# EAGLE board hacksaw_main_r0 (EAGLE 7.3.0)
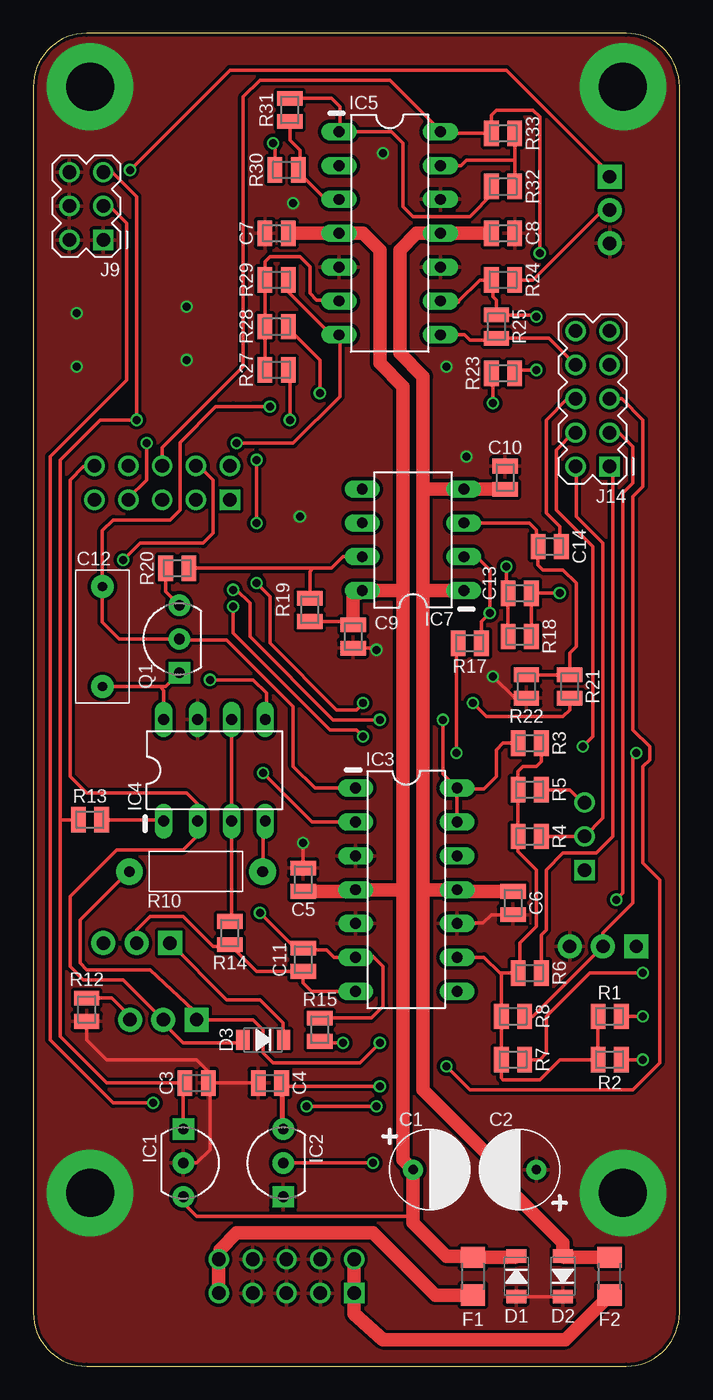
[diagram p0: board, top side]
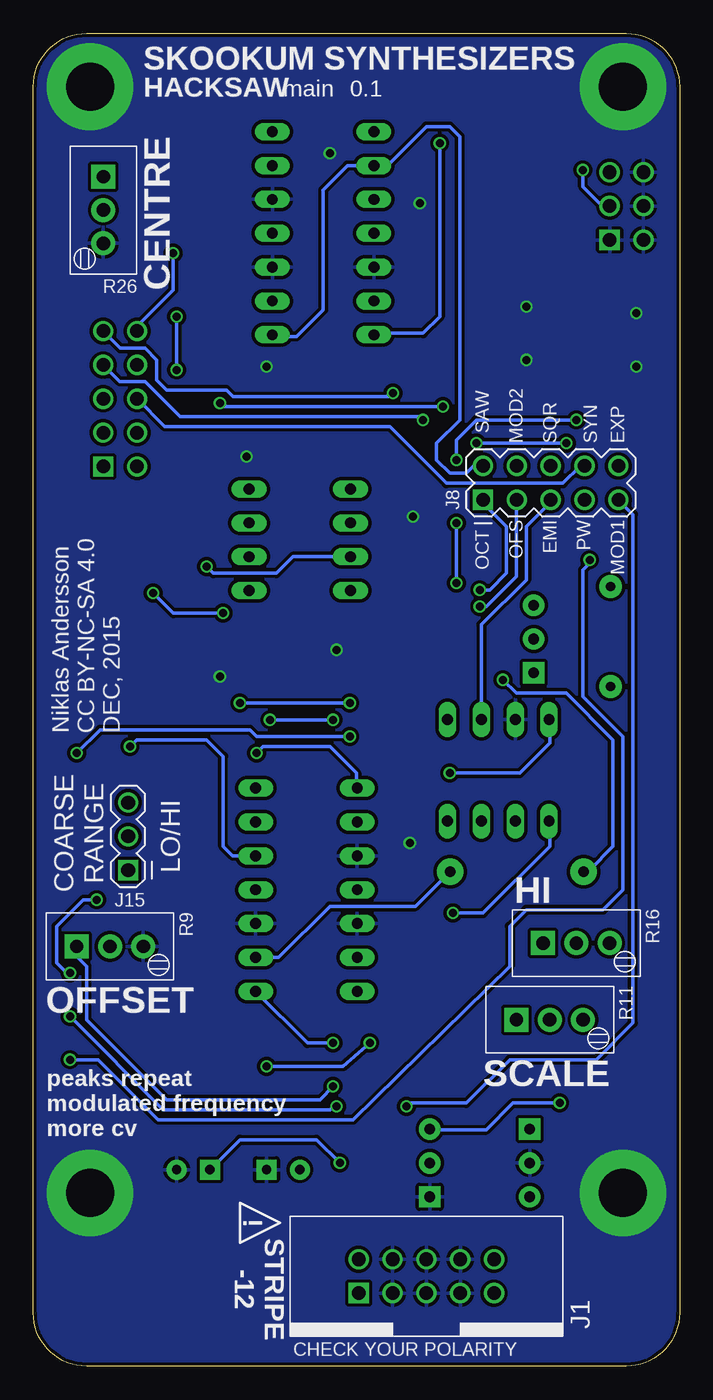
[diagram p1: board, bottom side, seen from below]

Size 48.5 x 100 mm. Coordinates in mm from the lower left corner, seen from the top.
Outline: 4,0 44.5,0 arc90 48.5,4 48.5,96 arc90 44.5,100 4,100 arc90 0,96 0,4 arc90 4,0
Copper layers (1*16): Top 0.035mm / dielectric 1.5mm / Bottom 0.035mm
Design rules "dirt_cheap_dirty_boards.v1 *": minimum track width 5mil, minimum drill 12mil, track to track 6mil, track to pad 6mil, pad to pad 6mil, via to via 6mil, smd to smd 0mil, copper to edge 10mil, drill to drill 10mil, minimum pad ring 10mil, minimum via ring 6mil, stop-mask expansion 2mil, vias tented up to drill 25mil, thermal gap 10mil

## Footprints (pad centres in the part's own frame; a part is rotated, then mirrored left to right if it is on the bottom)
CAP_POL_2.5-6 = drill 0.7 pad 1.5: + -1.25,0 | drill 0.7 pad 1.5 square: - 1.25,0
0805 = smd 1.1 x 1.9: 1 -0.875,0; 2 0.875,0
PHE450 = drill 0.7 pad 1.7: 1 -3.75,0; 2 3.75,0
SOD123 = smd 1 x 1.5: A 1.525,0; K -1.525,0
1206 = smd 1.6 x 1.803: 1 -1.422,0; 2 1.422,0
TO-92_2 = drill 0.8 pad 1.6 square: 1 -2.54,0 | drill 0.8 pad 1.6: 2 0,0; 3 2.54,0
DIL14 = drill 0.813 long: 1 -7.62,-3.81; 2 -5.08,-3.81; 3 -2.54,-3.81; 4 0,-3.81; 5 2.54,-3.81; 6 5.08,-3.81; 7 7.62,-3.81; 8 7.62,3.81; 9 5.08,3.81; 10 2.54,3.81; 11 0,3.81; 12 -2.54,3.81; 13 -5.08,3.81; 14 -7.62,3.81
DIL8 = drill 0.813 long: 1 -3.81,-3.81; 2 -1.27,-3.81; 3 1.27,-3.81; 4 3.81,-3.81; 5 3.81,3.81; 6 1.27,3.81; 7 -1.27,3.81; 8 -3.81,3.81
HDR_POWER_10 = drill 1.016: +12V1 5.08,1.27; +12V2 5.08,-1.27; -12V1 -5.08,1.27; GND1 2.54,1.27; GND2 2.54,-1.27; GND3 0,1.27; GND4 0,-1.27; GND5 -2.54,1.27; GND6 -2.54,-1.27 | drill 1.016 square: -12V2 -5.08,-1.27
HDR_M_5X2 = drill 1.016 square: 1 0,0 | drill 1.016: 2 0,2.54; 3 2.54,0; 4 2.54,2.54; 5 5.08,0; 6 5.08,2.54; 7 7.62,0; 8 7.62,2.54; 9 10.16,0; 10 10.16,2.54
HDR_M_3X2 = drill 1.016 square: 1 0,0 | drill 1.016: 2 0,2.54; 3 2.54,0; 4 2.54,2.54; 5 5.08,0; 6 5.08,2.54
HDR_M_3 = drill 1.016 square: 1 -2.54,0 | drill 1.016: 2 0,0; 3 2.54,0
M3 = drill 3.6 pad 6.5: M3 0,0
PV36W = drill 1 pad 1.8 square: 1 -2.5,0 | drill 1 pad 1.8: 2 0,0; 3 2.5,0
RESISTOR_TH_1/4W = drill 0.8 pad 2: 1 -5,0; 2 5,0

## Placement (x,y rotation side)
C1  33u  [CAP_POL_2.5-6]  29.75,14.75 0 top
C2  33u  [CAP_POL_2.5-6]  36.5,14.75 180 top
C3  104  [0805]  12.25,21.25 0 top
C4  104  [0805]  17.75,21.25 0 top
C5  104  [0805]  20.25,36.5 90 top
C6  104  [0805]  36,34.75 90 top
C7  104  [0805]  18.25,85 180 top
C8  104  [0805]  35.25,85 180 top
C9  104  [0805]  24,54.75 270 top
C10  104  [0805]  35.41,66.66 270 top
C11  101  [0805]  20.25,30.5 270 top
C12  222  [PHE450]  5.18,54.74 90 top
C13  15  [0805]  36.5,58 180 top
C14  471  [0805]  38.75,61.5 180 top
D1  5819  [SOD123]  36.25,6.75 270 top
D2  5819  [SOD123]  39.75,6.75 90 top
D3  4148  [SOD123]  17.25,24.5 180 top
F1  0ZCJ  [1206]  33,6.75 90 top
F2  0ZCJ  [1206]  43.25,6.75 270 top
IC1  78L05  [TO-92_2]  11.25,15.25 270 top
IC2  79L05  [TO-92_2]  18.75,15.25 90 top
IC3  TL074CN  [DIL14]  28,35.75 270 top
IC4  SSM2212  [DIL8]  13.6,44.71 0 top
IC5  TL074CN  [DIL14]  26.75,85 270 top
IC7  LM311P  [DIL8]  28.5,62 90 top
J1  [HDR_POWER_10]  19,6.75 0 bottom
J8  CONN_HDR_5X21  [HDR_M_5X2]  14.75,65 0 bottom
J9  CONN_HDR_3X21  [HDR_M_3X2]  5.25,84.5 90 top
J14  CONN_HDR_5X21  [HDR_M_5X2]  43.25,67.5 90 top
J15  TERMINAL_3_MHDR  [HDR_M_3]  41.38,39.75 90 bottom
M2  MOUNTING_HOLEM3  [M3]  4.25,13 0 top
M3  MOUNTING_HOLEM3  [M3]  44.25,13 0 top
M4  MOUNTING_HOLEM3  [M3]  4.25,96 0 top
M5  MOUNTING_HOLEM3  [M3]  44.25,96 0 top
Q1  2N5485  [TO-92_2]  10.95,54.56 90 top
R1  100K  [0805]  43.25,26.25 180 top
R2  100K  [0805]  43.25,23 180 top
R3  100K  [0805]  37.25,46.75 180 top
R4  100K  [0805]  37.25,39.75 180 top
R5  100K  [0805]  37.25,43.25 180 top
R6  1M2  [0805]  37.25,29.5 180 top
R7  100K  [0805]  36,23 180 top
R8  47K  [0805]  36,26.25 180 top
R9  10K  [PV36W]  42.75,31.5 0 bottom
R10  2K  [RESISTOR_TH_1/4W]  12.21,37.11 180 top
R11  100R  [PV36W]  9.75,26 0 bottom
R12  390R  [0805]  4,26.75 270 top
R13  1M  [0805]  4.25,41 180 top
R14  2K  [0805]  14.75,32.5 90 top
R15  100K  [0805]  21.5,25.25 270 top
R16  1MEG  [PV36W]  7.75,31.75 0 bottom
R17  10K  [0805]  32.75,54.25 0 top
R18  100K  [0805]  36.5,54.75 180 top
R19  10K  [0805]  20.75,56.75 270 top
R20  1K  [0805]  10.8,59.87 0 top
R21  47K  [0805]  40.25,51 270 top
R22  91K  [0805]  37,51 90 top
R23  120K  [0805]  35.25,74.5 0 top
R24  120K  [0805]  35.25,81.5 180 top
R25  300K  [0805]  34.75,78 270 top
R26  10K  [PV36W]  43.25,86.75 270 bottom
R27  110K  [0805]  18.25,74.75 180 top
R28  110K  [0805]  18.25,78 180 top
R29  100K  [0805]  18.25,81.5 0 top
R30  10K  [0805]  19,89.75 0 top
R31  1M  [0805]  19.25,94.25 90 top
R32  100K  [0805]  35.25,88.5 0 top
R33  47K  [0805]  35.25,92.5 180 top

## Library data of the parts
C1-C14 D1-D3 F1 F2 IC1-IC5 IC7 J1 J8 J9 J14 J15 M2-M5 Q1 R1-R33 = 000

## Nets
2_COARSE: J14.2 J15.2 R4.1
2_EXP: J14.3 R7.1
2_FINE: J14.1 R6.1
2_LIN: J14.5 R15.2
2_PULSE_OUT: IC5.14 J8.6 J14.10 R33.2
2_PWM: J14.7 R27.1
2_PWM_INIT: J14.9 R28.1
2_SAW_OUT: IC5.2 IC5.8 J8.2 J14.8 R25.2
2_SYNC_IN: C14.1 J8.8 J14.6
2_SYNC_PULSE: C13.2 IC7.7 R18.2 R19.1 R20.2
2_V/OCT: IC3.12 J14.4
+5V: C3.1 IC1.1 J9.5 R13.2 R21.2
+12V: C1.+ C5.1 C7.1 C9.1 D1.K F1.2 IC1.3 IC3.4 IC5.4 IC7.8 R19.2
-5V: C4.2 IC2.3 J9.3 R9.1 R26.1
-12V: C2.- C6.2 C8.2 C10.2 D2.A F2.1 IC2.2 IC3.11 IC5.11 IC7.1 IC7.4
C1: C11.1 IC3.6 IC4.1 R13.1 R15.1
C2: C12.1 IC3.2 IC4.8 Q1.1
CV: IC3.8 R10.2 R11.1
EMIT: IC4.3 IC4.6 J8.5 R14.2
EXPO: D3.A IC4.2 J8.10 R11.2
GND: C1.- C2.+ C3.2 C4.1 C5.2 C6.1 C7.2 C8.1 C9.2 C10.1 D1.A D2.K IC1.2 IC2.1 IC3.3 IC3.5 IC3.10 IC4.7 IC5.5 IC5.10 IC5.12 J1.GND1 J1.GND2 J1.GND3 J1.GND4 J1.GND5 J1.GND6 J9.1 J9.2 J9.4 J9.6 M2.M3 M3.M3 M4.M3 M5.M3 R9.3 R12.2 R22.1 R26.3
MOD1: J8.9 R1.1
MOD2: J8.4 R2.1
N$3: C13.1 IC7.2 R17.2 R18.1
N$4: F1.1 J1.+12V1 J1.+12V2
N$5: R11.3 R12.1
N$6: IC5.1 R31.2 R32.1
N$8: D3.K R16.1
N$9: IC5.6 R27.2 R28.2 R29.1
N$10: Q1.3 R20.1
N$11: IC5.3 R30.2 R31.1
N$16: J15.3 R5.1
N$17: IC5.13 R32.2 R33.1
N$19: IC3.9 R1.2 R2.2 R3.1 R4.2 R5.2 R6.2 R7.2 R8.2 R10.1
N$30: IC5.9 R23.2 R24.2 R25.1
N$33: R24.1 R26.2
N$41: F2.2 J1.-12V1 J1.-12V2
N$54: C11.2 IC3.7 R14.1 R16.2
OFFSET: J8.3 R8.1 R9.2
PW: IC5.7 J8.7 R29.2 R30.1
RAW: C12.2 IC3.1 Q1.2 R17.1 R23.1
RESET: C14.2 IC7.3 R21.1 R22.2
V/OCT: IC3.13 IC3.14 J8.1 R3.2

## Tracks (layer width: path | path; a pad name or v marks a point on that pad's centre or on a via)
2_COARSE
  Top 0.25: R4.1 J15.2 42.75,41.12 42.75,61.75 40.75,63.75 40.75,67.46 J14.2
2_EXP  (via drill 0.6)
  Top 0.25: J14.3 43.96,70.04 45,69 45,66.25 44.25,65.5 44.25,35.5 v43.75,35 | R7.1 38,23 38.5,23.5 38.5,26.25 41.75,29.5 v45.75,29.5
  Bottom 0.25: v45.75,29.5 46,29.5 46.75,30.25 46.75,33 44.75,35 v43.75,35
2_FINE
  Top 0.25: R6.1 38.12,32.38 38.5,32.75 38.5,37.25 39.75,38.5 42.25,38.5 43.5,39.75 43.5,67.25 J14.1
2_LIN  (via drill 0.6)
  Top 0.25: v23.25,24.25 21.62,24.25 R15.2 | J14.5 44.17,72.58 45.75,71 45.75,66 45,65.25 45,47.75 46.25,46.5 46.25,45.5 45.75,45 45.75,37.75 47,36.5 47,22.75 45,20.75 32.75,20.75 v31,22.5
  Bottom 0.25: v31,22.5 25.25,22.5 v23.25,24.25
2_PULSE_OUT  (via drill 0.6)
  Top 0.25: J8.6 9.67,68.92 15.75,75 15.75,95.25 17,96.5 26.75,96.5 30.56,92.69 IC5.14 30.68,92.5 R33.2 34.38,93.88 34.75,94.25 37.5,94.25 38,93.75 v38,83.5
  Bottom 0.25: 30.44,92.5 IC5.14 | v38,83.5 38,80.75 40.75,78 40.75,77.7 J14.10
2_PWM  (via drill 0.6)
  Top 0.25: R27.1 19.25,74.75 v19.25,71
  Bottom 0.25: v19.25,71 19.5,71.25 37.5,71.25 40.12,73.88 42.01,73.88 J14.7
2_PWM_INIT  (via drill 0.6)
  Top 0.25: R28.1 19.12,77.88 21.5,75.5 v21.5,73
  Bottom 0.25: J14.9 41.97,76.38 40.12,76.38 39.25,75.5 39.25,74 38.5,73.25 34,73.25 33.5,72.75 21.75,72.75 v21.5,73
2_SAW_OUT
  Top 0.25: IC5.8 32.37,77.38 32.75,77 34.62,77 R25.2 38.7,77.12 J14.8
  Bottom 0.25: 14.71,67.54 J8.2 15.46,67.54 16,67 17.25,67 18.25,68 18.25,69.25 16.5,71 16.5,92.25 17.25,93 19,93 22,90 22.86,90 IC5.2 24.92,90.08 26.75,88.25 26.75,79.25 28.75,77.25 30.43,77.25 IC5.8
2_SYNC_IN
  Top 0.25: J14.6 40.08,72.58 38.5,71 38.5,64 39.5,63 39.5,61.62 C14.1
  Bottom 0.25: J8.8 7.46,67.54 8.75,66.25 17.5,66.25 21.75,70.5 38.63,70.5 J14.6
2_SYNC_PULSE  (via drill 0.6)
  Top 0.25: R20.2 21,59.87 | 21,59.87 22.37,59.87 23.25,60.75 24.67,60.75 IC7.7 | R18.2 C13.2 35.5,58.12 v35.5,60 | R19.1 20.75,59.62 21,59.87
  Bottom 0.25: IC7.7 29.02,60.73 30.25,59.5 35,59.5 v35.5,60
2_V/OCT  (via drill 0.6)
  Top 0.25: v41.25,46.5 42,47.25 42,61.5 39.25,64.25 39.25,68.75 40.54,70.04 J14.4
  Bottom 0.25: IC3.12 33.54,38.29 34.25,39 34.25,45.75 35.5,47 40.75,47 v41.25,46.5
+5V  (via drill 0.6)
  Top 0.25: IC1.1 11.25,21.12 C3.1 5.5,21.25 2,24.75 2,41 | R13.2 2,41 | 2,41 2,68 5,71 v7.75,71 7.75,87.75 6,89.5 5.33,89.5 J9.5 | R21.2 40.25,49.25 39.75,48.75 34,48.75 v33,49.75 | v16.75,58.75 17.75,57.75 17.75,54.25 22.75,49.25 24.25,49.25 v24.75,49.75 | v16.75,63.25 v16.75,68
  Bottom 0.25: v33,49.75 v24.75,49.75 | v7.75,71 15.25,71 16.75,69.5 v16.75,68 | v16.75,58.75 v16.75,63.25
+12V
  Top 0.25: IC1.3 11.25,12.25 12.25,11.25 28,11.25 28.5,10.75 | 24.19,35.62 IC3.4 | 27.31,58.19 27.75,58.25 | 23.93,55.7 C9.1 23.75,55.88 R19.2 | 27.5,65.81 27.75,65.5 | 24.5,58 IC7.8 | 32.92,8.25 F1.2 | 36.15,8.17 D1.K
  Top 1: 27.75,35.75 27.75,15.5 C1.+ 28.5,10.75 31,8.25 32.92,8.25 | C5.1 24.19,35.62 | IC3.4 27.75,35.75 | 27.75,35.75 27.75,58.25 27.75,65.5 27.75,73.5 26,75.25 26,83.75 24.75,85 IC5.4 C7.1 | C9.1 24,58 24.5,58 | IC7.8 27.31,58.19 | F1.2 36.15,8.17
-5V  (via drill 0.6)
  Top 0.25: IC2.3 18.75,21.12 C4.2 | v26,21 18.88,21 C4.2 | C4.2 18.62,17.88 v18.75,17.75 | R26.1 43,89.5 43,89.75 35.5,97.25 14.75,97.25 v7.25,89.75 | v9,19.75 6,19.75 1.25,24.5 1.25,68.25 7,74 7,85.75 5.75,87 5.29,87 J9.3
  Bottom 0.25: v26,21 27,20 38.5,20 44.5,26 44.5,30 45.25,30.75 R9.1 | v18.75,17.75 14.5,17.75 12.5,19.75 v9,19.75 | v7.25,89.75 7.25,88.5 5.75,87 5.29,87 J9.3
-12V  (via drill 0.6)
  Top 0.25: IC2.2 v25.5,15.25 | 31.81,35.62 IC3.11 | 35.38,65.81 C10.2 35.41,65.81 | 29.56,65.81 29.25,65.75 | 29.69,58.19 29.25,58 | 39.85,8.17 D2.A
  Top 1: IC3.11 29.25,35.75 | 29.25,35.75 29.25,20.75 C2.- 35.25,13.75 39.75,9.25 D2.A | C6.2 31.81,35.62 | 29.25,35.75 29.25,58 29.25,65.75 29.25,74.25 27.5,76 27.5,83.75 28.75,85 IC5.11 C8.2 | 29.56,65.81 IC7.4 35.41,65.81 | IC7.1 29.69,58.19 | F2.1 39.85,8.17
  Bottom 0.25: C2.- 33,17 27.25,17 v25.5,15.25
C1  (via drill 0.6)
  Top 0.25: 9.75,40.94 IC4.1 | 9.75,40.86 IC4.1 | R15.1 25.38,26.12 26.25,27 26.25,30 25.5,30.75 24.27,30.75 IC3.6 22.58,30.67 22,31.25 20.38,31.25 C11.1 19.62,31.38 v17,34 | R13.1 9.69,41 IC4.1
  Bottom 0.25: v17,34 14.75,34 9.75,39 9.75,40.86 IC4.1
C2  (via drill 0.6)
  Top 0.25: C12.1 9.5,50.99 | 9.5,50.99 9.92,50.99 Q1.1 | IC4.8 9.79,50.7 9.5,50.99 | IC3.2 20.92,40.83 v17.25,44.5
  Bottom 0.25: v17.25,44.5 12,44.5 9.75,46.75 9.75,48.48 IC4.8
CV  (via drill 0.6)
  Top 0.25: R10.2 7.25,37.07 7.25,37.25 3.5,33.5 3.5,30.25 4,29.75 8.75,29.75 12.5,26.25 R11.1 16.5,26 17.25,25.25 17.25,23.5 18,22.75 24.5,22.75 v26,24.25
  Bottom 0.25: v26,24.25 27.93,24.25 IC3.8
EMIT
  Top 0.25: R14.2 14.87,33.38 IC4.3 IC4.6
  Bottom 0.25: J8.5 9.75,64.92 9.75,64.75 11.5,63 11.5,59 14.87,55.63 IC4.6
EXPO
  Top 0.25: D3.A 15.22,24.25 11.25,24.25 9.75,25.75 R11.2 6.75,29 3.75,29 2.75,30 2.75,35.25 6.25,38.75 11.25,38.75 12.25,39.75 12.25,40.82 IC4.2 12.33,42.17 11.5,43 4,43 2.75,44.25 2.75,66.5 3.75,67.5 4.55,67.5 J8.10
GND  (via drill 0.6)
  Top 0.25: C3.2 C4.1 | IC1.2 12.25,15.25 13.25,16.25 13.25,21.12 C3.2 | D2.K D1.A | C5.2 v20.25,39.25 | C6.1 34.38,33.88 33.75,33.25 31.85,33.25 IC3.10 | R12.2 4,24.5 5.5,23 12.25,23 13,22.25 13,21.38 C3.2 | C9.2 25.62,53.88 v25.75,53.75 | R22.1 36.12,50.12 v34.5,51.75
  other vias: 20,63.75 32.5,68.25 31,75 26.25,91 19.5,87.25 11.5,79.5 11.5,75.5 3.25,75 3.25,79
  pour Bottom (isolate 0.25): 0,100 48.5,100 48.5,0 0,0
  pour Top (isolate 0.25): 0,100 48.5,100 48.5,0 0,0
MOD1  (via drill 0.6)
  Top 0.25: R1.1 v45.75,26.25 | v20.5,19.5 v25.75,19.5
  Bottom 0.25: v20.5,19.5 20.25,19.75 16,19.75 12.75,23 6.25,23 3.5,25.75 3.5,63.91 J8.9 | v45.75,26.25 38.75,19.25 26.25,19.25 26,19.5 v25.75,19.5
MOD2  (via drill 0.6)
  Top 0.25: R2.1 v45.75,23 | J8.4 12.46,67.54 13.5,66.5 13.5,62.5 12.75,61.75 8,61.75 v6.75,60.5
  Bottom 0.25: v6.75,60.5 6.75,60.25 7.25,59.75 7.25,50.25 4.25,47.25 4.25,35.75 5.75,34.25 11.5,34.25 12.75,33 12.75,30 24.5,18.5 39.12,18.5 43.62,23 v45.75,23
N$2
  Top 0.25: 17.25,36.75 17.25,40.25 17.5,40.75
N$3  (via drill 0.6)
  Top 0.25: R17.2 33.62,55.88 v34.25,56.5 34.25,59.75 33.25,60.75 32.33,60.75 IC7.2 | R18.1 C13.1 v39.5,58
  Bottom 0.25: v34.25,56.5 38,56.5 v39.5,58 | 32.33,60.75 IC7.2
N$4
  Top 0.25: 14,8.1 J1.+12V1
  Top 1: J1.+12V1 J1.+12V2 | F1.1 30.17,5.33 25.5,10 15.25,10 14,8.75 14,8.1
N$5
  Top 0.25: R12.1 5.88,27.62 7.25,26.25 R11.3
N$6
  Top 0.25: 34.25,88.38 R32.1 34.5,88.38 34.5,88 32.75,86.25 28.5,86.25 27.75,87 27.75,91.75 26.88,92.62 IC5.1 23,92.68 23,94.5 22.38,95.12 R31.2 19.12,95.25
N$8
  Top 0.25: R16.1 14.5,27.5 17,27.5 18.75,25.75 18.75,24.52 D3.K
N$9
  Top 0.25: R27.2 R28.2 R29.1 17.38,82.88 17.75,83.25 20,83.25 20.75,82.5 20.75,80.5 21.25,80 22.86,80 IC5.6
N$10
  Top 0.25: R20.1 9.93,58.12 Q1.3
N$11
  Top 0.25: R31.1 19.25,92 20,91.25 20,89.88 R30.2 19.88,89.62 22,87.5 22.9,87.5 IC5.3
N$16
  Top 0.25: R5.1 40.25,43.25 41.25,42.25 41.34,42.25 J15.3
N$17
  Top 0.25: R33.1 36.12,90.5 | 36.12,90.5 R32.2 | IC5.13 32.08,90.08 32.5,90.5 36.12,90.5
N$19
  Top 0.25: IC3.9 33.83,30.67 35,29.5 | 35,29.5 R6.2 36.5,29.62 36.5,31.75 37.75,33 37.75,37.25 36.38,38.62 R4.2 R5.2 36.38,44.62 36.75,45 37.75,45 38.12,45.38 R3.1 | R1.2 R2.2 | 42.25,22.88 R2.2 | 35,29.5 35.12,29.38 R8.2 R7.2 35.12,21.62 35.25,21.5 38,21.5 39.5,23 R2.2
  Bottom 0.25: IC3.9 30.08,30.67 26.25,34.5 19.82,34.5 R10.1
N$30  (via drill 0.6)
  Top 0.25: IC5.9 31.92,79.92 | 31.92,79.92 33.5,81.5 R24.2 34.5,81.38 34.5,80.25 34.75,80 R25.1 37.62,78.88 v37.75,78.75 | 31.92,79.92 31.92,79.83 | v37.75,74.75 36.38,74.75 R23.2
  Bottom 0.25: v37.75,78.75 v37.75,74.75
N$33
  Top 0.25: R24.1 37.5,81.5 42.75,86.75 R26.2
N$41
  Top 1: J1.-12V1 J1.-12V2 24.08,3.92 26.25,2 39.92,2 F2.2
N$54
  Top 0.25: R16.2 7.75,32.75 8.75,33.75 11.25,33.75 13.5,31.5 14.62,31.5 R14.1 16.75,29.62 C11.2 20.25,28.75 20.87,28.13 IC3.7
OFFSET  (via drill 0.6)
  Top 0.25: v15,57 15,55 22.25,47.75 24.25,47.75 v24.75,47.25 | 42.75,31.75 R9.2 | v45.25,46 45,45.75 45,34.75 42.75,32.5 R9.2 | R8.1 37.5,26.25 R9.2
  Bottom 0.25: v45.25,46 43.5,47.75 32.25,47.75 31.75,47.25 v24.75,47.25 | J8.3 12.25,64.96 12.25,59.25 14.5,57 v15,57
PW  (via drill 0.6)
  Top 0.25: R29.2 19.12,80.62 22,77.75 22.57,77.75 IC5.7 23,77.32 23,72.75 19.5,69.25 v15.25,69.25 | 18.12,89.12 R30.1 18.12,91.62 v18,91.75 | J8.7 7.13,65.13 8.5,66.5 v8.5,69.25
  Bottom 0.25: v18,91.75 18,78.75 19.25,77.5 22.82,77.5 IC5.7 | v8.5,69.25 v15.25,69.25
RAW  (via drill 0.6)
  Top 0.25: IC3.1 21.13,43.37 19.5,45 19.5,49.5 14.5,54.5 11.01,54.5 Q1.2 6.44,54.56 5.18,55.82 C12.2 5.18,62.68 6,63.5 10.25,63.5 11,64.25 11,69.3 13.7,72 15,72 16.5,72 v17.75,72 | v31.75,46 31.75,54.12 R17.1 | R23.1 34.38,74 | 34.38,74 34.38,73.62 | v34.5,72.25 34.5,73.88 34.38,74
  Bottom 0.25: IC3.1 24.25,43.43 24.25,44.5 26.25,46.5 31.25,46.5 v31.75,46 | v17.75,72 34.25,72 v34.5,72.25
RESET
  Top 0.25: R22.2 R21.1 40.25,53.5 40.75,54 40.75,58.75 39.75,59.75 38.25,59.75 37.88,60.12 C14.2 37.75,61.62 37.75,62.75 37.23,63.27 IC7.3
S$1  (via drill 0.6)
  Top 0.25: v13.25,51.5 16.5,51.5 17.5,50.5 17.5,48.75 17.25,48.5
  Bottom 0.25: 7,37.25 6.75,37.25 5,39 5,47 8.5,50.5 12.25,50.5 v13.25,51.5
V/OCT  (via drill 0.6)
  Top 0.25: IC3.14 IC3.13 | IC3.14 31.31,43.31 33.81,43.31 34.75,44.25 34.75,46.25 35.25,46.75 R3.2 | v26,48.5 22.5,48.5 16.25,54.75 16.25,57.25 15.25,58.25 v15,58.25 | v30.75,48.5 30.75,44.43 IC3.14
  Bottom 0.25: v26,48.5 v30.75,48.5 | J8.1 14.75,64.75 13,63 13,59.5 14.25,58.25 v15,58.25

## Text on the board
bPlace: SKOOKUM SYNTHESIZERS | 0.1 | main | HACKSAW | CENTRE | SAW | EXP | SYN | SQR | MOD2 | MOD1 | PW | EMI | OFS | OCT | LO/HI | COARSE / RANGE | HI | OFFSET | SCALE | peaks repeat / modulated frequency / more cv | CHECK YOUR POLARITY
bNames: Niklas Andersson / CC BY-NC-SA 4.0 / DEC, 2015